# EAGLE board thermal-flashlight (EAGLE 6.5.0)
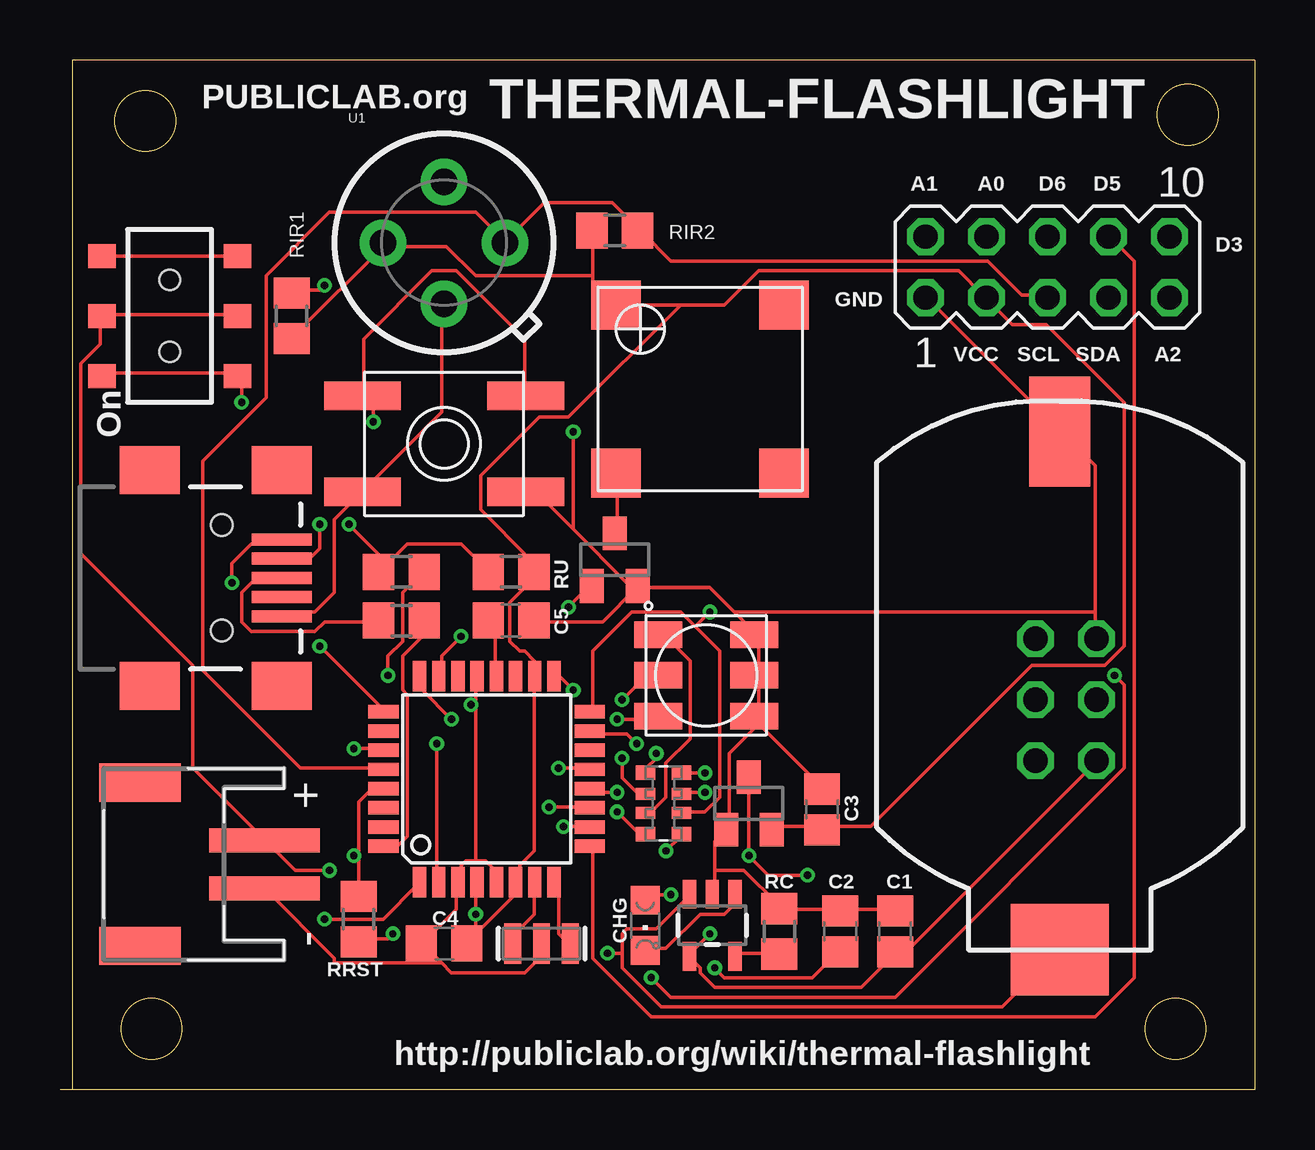
[diagram p0: board, top side]
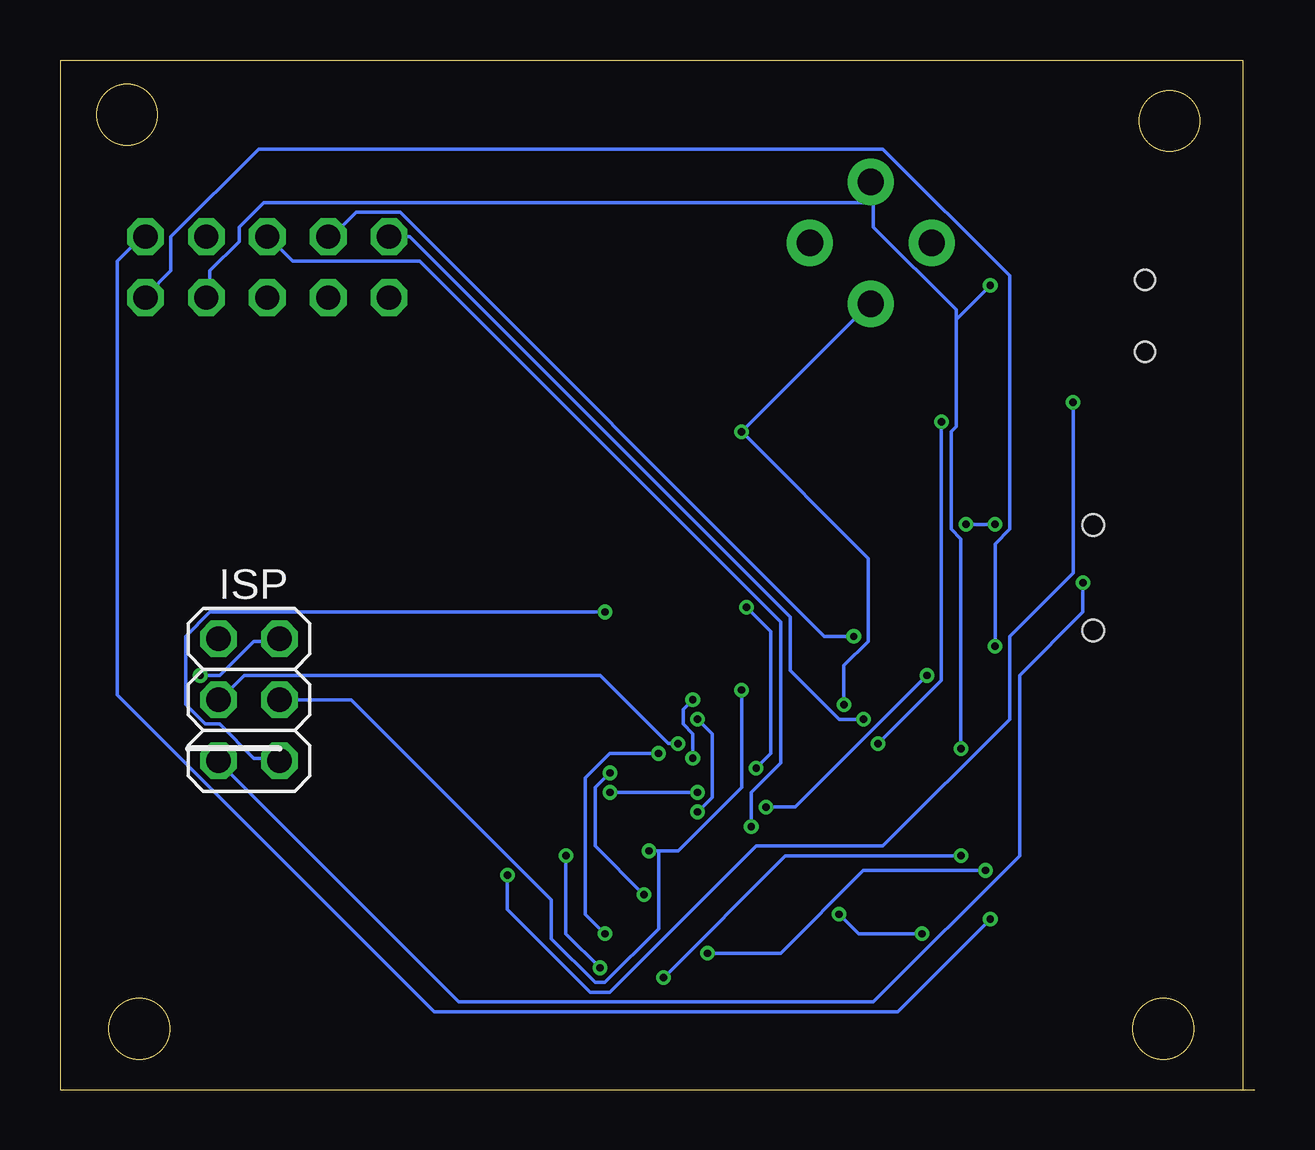
[diagram p1: board, bottom side, seen from below]

Size 49.78 x 42.93 mm. Coordinates in mm from the lower left corner, seen from the top.
Outline: 0.51,0 49.78,0 49.78,42.93 0.51,42.93 0.51,0
Outline: 0.51,0 0,0
Outline: circle at 3.81,2.54 radius 1.27
Outline: circle at 3.56,40.39 radius 1.27
Outline: circle at 46.99,40.64 radius 1.27
Outline: circle at 46.48,2.54 radius 1.27
Copper layers (1*16): Top 0.035mm / dielectric 1.5mm / Bottom 0.035mm
Design rules "Fusion_eagle_rule_v1.1 *": minimum track width 6mil, minimum drill 12mil, track to track 6mil, track to pad 6mil, pad to pad 6mil, via to via 6mil, smd to smd 0mil, copper to edge 10mil, drill to drill 10mil, minimum pad ring 10mil, minimum via ring 6mil, stop-mask expansion 2mil, vias tented up to drill 100mil, thermal gap 25mil
Net classes: 1 power: width 0.254 mm, clearance 0.203 mm
vRestrict: area 22.9,6.1 to 23.6,7.6; area 9.7,11.7 to 10.7,12.7

## Footprints (pad centres in the part's own frame; a part is rotated, then mirrored left to right if it is on the bottom)
BATTCOM_20MM_PTH_SMT = smd 4.572 x 2.54: P$1 0,0 | smd 3.81 x 4.064: P$2 21.59,0
EVQ-Q2 = smd 3.2 x 1.2: A -3.4,-2; A' 3.4,-2; B -3.4,2; B' 3.4,2
C0805 = smd 1.3 x 1.5: 1 -0.85,0; 2 0.85,0
C0805' = smd 1.3 x 1.5: 1 -0.95,0; 2 0.95,0
CHIPLED_0805 = smd 1.2 x 1.2: A 0,-1.05; C 0,1.05
JST-PH-2-SMT-RA = smd 1 x 4.6: 1 1,-3.7; 2 -1,-3.7 | smd 1.6 x 3.4: NC1 -3.4,1.5; NC2 3.4,1.5
TQFP32-08 = smd 1.27 x 0.559: 1 -4.293,2.8; 2 -4.293,2; 3 -4.293,1.2; 4 -4.293,0.4; 5 -4.293,-0.4; 6 -4.293,-1.2; 7 -4.293,-2; 8 -4.293,-2.8; 17 4.293,-2.8; 18 4.293,-2; 19 4.293,-1.2; 20 4.293,-0.4; 21 4.293,0.4; 22 4.293,1.2; 23 4.293,2; 24 4.293,2.8 | smd 0.559 x 1.27: 9 -2.8,-4.293; 10 -2,-4.293; 11 -1.2,-4.293; 12 -0.4,-4.293; 13 0.4,-4.293; 14 1.2,-4.293; 15 2,-4.293; 16 2.8,-4.293; 25 2.8,4.293; 26 2,4.293; 27 1.2,4.293; 28 0.4,4.293; 29 -0.4,4.293; 30 -1.2,4.293; 31 -2,4.293; 32 -2.8,4.293
SOT23-5 = smd 0.55 x 1.2: 1 -0.95,-1.3; 2 0,-1.3; 3 0.95,-1.3; 4 0.95,1.3; 5 -0.95,1.3
SOT23 = smd 1 x 1.4: 1 -0.95,-1.1; 2 0.95,-1.1; 3 0,1.1
2X03 = drill 1.016 octagon: 1 -2.54,-1.27; 2 -2.54,1.27; 3 0,-1.27; 4 0,1.27; 5 2.54,-1.27; 6 2.54,1.27
AYZ0202 = smd 1 x 1.15: 1 -2.5,2.825; 2 0,2.825; 3 2.5,2.825; 4 -2.5,-2.825; 5 0,-2.825; 6 2.5,-2.825 | hole 0.85: 1.5,0; -1.5,0
RGBLED5050 = smd 2 x 1.1: 1 -2,1.7; 2 -2,0; 3 -2,-1.7; 4 2,-1.7; 5 2,0; 6 2,1.7
R0805 = smd 1.3 x 1.5: 1 -0.95,0; 2 0.95,0
EXB38V = smd 0.6 x 0.8: 1 -1.275,-0.75; 4 1.275,-0.75; 5 1.275,0.75; 8 -1.275,0.75 | smd 0.5 x 0.8: 2 -0.4,-0.75; 3 0.4,-0.75; 6 0.4,0.75; 7 -0.4,0.75
R0805@1 = smd 1.3 x 1.5: 1 -0.95,0; 2 0.95,0
MA05-2 = drill 1.016 octagon: 1 -5.08,-1.27; 2 -5.08,1.27; 3 -2.54,-1.27; 4 -2.54,1.27; 5 0,-1.27; 6 0,1.27; 7 2.54,-1.27; 8 2.54,1.27; 9 5.08,-1.27; 10 5.08,1.27
TO-39 = drill 1.1 pad 1.93: 1 2.54,0; 2 0,2.54; 3 -2.54,0; 4 0,-2.54
SMT-8585-BUZZER = smd 2.05 x 2.05: + -3.5,-3.5; - 3.5,-3.5; NC1 -3.5,3.5; NC2 3.5,3.5
RESONATOR-SMD = smd 0.7 x 1.7: 1 -1.2,0; 2 0,0; 3 1.2,0
USB-MINIB = smd 2.5 x 0.5: D+ 2.5,0; D- 2.5,0.8; GND 2.5,-1.6; ID 2.5,-0.8; VBUS 2.5,1.6 | smd 2.5 x 2: GND@1 -3,-4.5; GND@2 -3,4.5; GND@3 2.5,4.5; GND@4 2.5,-4.5 | hole 0.9: 0,2.2; 0,-2.2

## Placement (x,y rotation side)
BAT1  LIR2032  [BATTCOM_20MM_PTH_SMT]  41.66,27.43 270 top
BTN  [EVQ-Q2]  16,26.92 0 top
C1  10u  [C0805]  34.8,6.6 90 top
C2  10u  [C0805]  32.51,6.6 90 top
C3  10u  [C0805]  31.75,11.68 90 top
C4  0.1uF  [C0805']  16,6.1 0 top
C5  0.1uF  [C0805']  18.8,19.56 180 top
CHG  0805  [CHIPLED_0805]  24.38,6.86 180 top
CN1  [JST-PH-2-SMT-RA]  4.83,9.4 90 top
IC1  ATMEGA328P  [TQFP32-08]  17.78,12.95 90 top
IC2  MCP73831  [SOT23-5]  27.18,6.86 180 top
IC4  MCP1700-33  [SOT23]  28.7,11.94 0 top
ISP  [2X03]  41.91,16.26 90 bottom
J1  AYZ0202  [AYZ0202]  4.57,32.26 90 top
LED  RGBLED5050  [RGBLED5050]  26.92,17.27 0 top
Q4  BSS123  [SOT23]  23.11,22.1 0 top
RC  22K  [R0805]  29.97,6.6 270 top
RD+  47  [R0805]  14.22,19.56 0 top
RD-  47  [R0805]  14.22,21.59 0 top
RIR1  10K  [R0805]  9.65,32.26 270 top
RIR2  10K  [R0805]  23.11,35.81 180 top
RN1  [EXB38V]  25.15,11.94 90 top
RRST  10k  [R0805@1]  12.45,7.11 270 top
RU  1.5K  [R0805]  18.8,21.59 0 top
SV1  [MA05-2]  41.15,34.29 0 top
U1  MLX90614_  [TO-39]  16,35.31 0 top
U$1  BUZZER  [SMT-8585-BUZZER]  26.67,29.21 270 top
X  12MHz  [RESONATOR-SMD]  20.07,6.1 0 top
X1  USBSMD  [USB-MINIB]  6.73,21.34 0 top

## Library data of the parts
BAT1 IC2 J1 X = SparkFunNew
BTN CN1 IC4 LED U$1 = adafruit
C1-C3 = resistor
C4 C5 RC RD+ RD- RIR1 RIR2 RRST RU = rcl
CHG = led
IC1 = atmel; MPN: ATMEGA8-16AU; OC_FARNELL: 9171371; OC_NEWARK: 73M8863
ISP = pinhead
Q4 = transistor-small-signal
RN1 = resistor-dil; OC_FARNELL: unknown; OC_NEWARK: unknown
SV1 = con-lstb; OC_FARNELL: unknown; OC_NEWARK: unknown
U1 X1 = SparkFun

## Nets
A0: IC1.23 SV1.4
A1: IC1.24 SV1.2
A2: IC1.25 SV1.9
A3: IC1.26
AREF: C5.2 IC1.20
D2: IC1.32 RD+.2
D3: IC1.1 SV1.10
D4: BTN.B BTN.B' IC1.2
D5: IC1.9 SV1.8
D6: IC1.10 SV1.6
D7: IC1.11 RD-.2
D8: IC1.12 RN1.3
D9: IC1.13 Q4.1
D10: IC1.14
D+: RD+.1 X1.D+
D-: RD-.1 RU.1 X1.D-
GND: BAT1.P$1 BTN.A BTN.A' C1.2 C2.2 C3.2 C4.1 C5.1 CN1.2 IC1.3 IC1.5 IC1.21 IC2.2 IC4.1 ISP.6 LED.4 LED.5 LED.6 Q4.2 RC.1 SV1.1 U1.4 X1.GND X.2
MISO: IC1.16 ISP.1 RN1.2
MOSI: IC1.15 ISP.4
N$1: J1.3 J1.6
N$2: IC1.7 X.1
N$3: IC1.8 X.3
N$4: LED.3 RN1.8
N$5: CHG.C IC2.1
N$6: IC2.5 RC.2
N$7: Q4.3 U$1.-
N$8: LED.1 RN1.7
N$9: LED.2 RN1.6
N$10: CHG.A RN1.4
N$12: IC1.19
N$13: IC1.22
RESET: IC1.29 ISP.5 RRST.1
RXD: IC1.30
SCK: IC1.17 ISP.3 RN1.1
SCL: IC1.28 RIR2.1 SV1.5 U1.1
SDA: IC1.27 RIR1.1 SV1.7 U1.2
TXD: IC1.31
VBAT: BAT1.P$2 CN1.1 IC2.3 J1.2 J1.5
VBUS: C1.1 IC2.4 ISP.2 RN1.5 X1.VBUS
VCC: C3.1 C4.2 IC1.4 IC1.6 IC1.18 IC4.2 RIR1.2 RIR2.2 RRST.2 RU.2 SV1.3 U1.3 U$1.+
VDD: C2.1 IC4.3 J1.1 J1.4

## Tracks (layer width: path | path; a pad name or v marks a point on that pad's centre or on a via)
A0  (via drill 0.3)
  Top 0.152: v16.71,18.9 15.9,18.09 15.9,17.27 IC1.23
  Bottom 0.152: v16.71,18.9 17.93,18.9 35.61,36.58 37.44,36.58 38.46,35.56 SV1.4
A1  (via drill 0.3)
  Top 0.152: v16.31,15.44 15.09,16.66 15.09,17.07 IC1.24
  Bottom 0.152: v16.31,15.44 17.32,15.44 19.36,17.48 19.36,19.71 35.2,35.56 SV1.2
A2  (via drill 0.3)
  Top 0.152: v10.82,18.49 13.46,15.85 IC1.25
  Bottom 0.152: v10.82,18.49 10.82,22.76 10.21,23.37 10.21,33.93 15.49,39.22 41.5,39.22 45.16,35.56 45.16,34.14 46.18,33.12 SV1.9
AREF
  Top 0.152: IC1.20 18.14,17.27 18.14,19.3 17.93,19.51 C5.2
D2
  Top 0.152: IC1.32 13.66,10.16 14.07,10.16 14.48,10.57 14.48,16.46 14.28,16.66 14.28,18.09 15.09,18.9 15.09,19.51 RD+.2
D3  (via drill 0.3)
  Top 0.152: v11.02,7.11 13.46,7.11 14.88,8.53 IC1.1
  Bottom 0.152: v11.02,7.11 14.88,3.25 34.19,3.25 47.4,16.46 47.4,34.54 46.38,35.56 SV1.10
D4  (via drill 0.3)
  Top 0.152: v15.7,14.43 15.7,8.74 IC1.2 | v13.06,27.84 13.06,28.45 12.65,28.85 BTN.B 12.65,29.06 12.65,31.29 15.49,34.14 16.51,34.14 19.36,31.29 19.36,29.06 BTN.B'
  Bottom 0.152: v15.7,14.43 13.06,17.07 v13.06,27.84
D5
  Top 0.152: IC1.9 22.2,9.96 22.2,5.49 24.64,3.05 43.13,3.05 44.75,4.67 44.75,34.54 43.74,35.56 SV1.8
D6  (via drill 0.3)
  Top 0.152: v20.98,10.97 22,10.97 IC1.10
  Bottom 0.152: v20.98,10.97 20.98,12.39 19.76,13.61 19.76,19.51 34.8,34.54 40.08,34.54 41.1,35.56 SV1.6
D7  (via drill 0.3)
  Top 0.152: v20.37,11.79 22,11.79 IC1.11 | v13.66,17.27 13.66,18.09 14.28,18.69 14.28,20.73 15.09,21.54 RD-.2
  Bottom 0.152: v20.37,11.79 19.15,11.79 v13.66,17.27
D8  (via drill 0.3)
  Top 0.152: v26.87,12.39 26.06,12.39 RN1.3 | v23.22,12.39 22.2,12.39 IC1.12
  Bottom 0.152: v23.22,12.39 v26.87,12.39
D9  (via drill 0.3)
  Top 0.152: v20.78,13.41 22,13.41 IC1.13 | v21.18,20.12 22,20.93 Q4.1
  Bottom 0.152: v20.78,13.41 20.17,14.02 20.17,19.1 v21.18,20.12
D+
  Top 0.152: X1.D+ 8.18,21.34 7.57,20.73 7.57,19.51 7.98,19.1 10.62,19.1 11.02,19.51 13.26,19.51 RD+.1
D-  (via drill 0.3)
  Top 0.152: 13.66,21.95 14.48,22.76 16.71,22.76 17.73,21.74 RU.1 | 13.66,21.95 13.46,21.74 RD-.1 13.66,21.95 | v10.82,23.57 10.82,22.55 10.41,22.15 9.4,22.15 X1.D- | 13.66,21.95 v12.04,23.57
  Bottom 0.152: v12.04,23.57 v10.82,23.57
GND  (via drill 0.3)
  Top 0.152: 41.71,27.43 36.22,32.92 SV1.1 | 43.13,19.91 43.13,26.01 41.71,27.43 | 43.13,19.91 43.13,18.9 ISP.6 | 41.71,27.43 BAT1.P$1 | 17.32,17.27 IC1.21 17.32,17.07 17.32,16.05 | 15.09,6.1 16.51,7.52 16.51,8.53 IC1.3 16.71,8.74 16.71,9.35 16.92,9.55 17.32,9.55 | 17.32,9.55 17.73,9.55 18.14,9.14 18.14,8.74 IC1.5 | 17.32,9.55 17.32,16.05 | 15.09,6.1 15.9,5.28 | 15.9,5.28 16.31,4.88 19.36,4.88 19.96,5.49 19.96,6.1 X.2 | 15.09,6.1 C4.1 | 15.9,5.28 11.43,5.28 11.43,5.49 8.58,8.33 CN1.2 | X1.GND 9.4,19.91 10.62,19.91 11.43,20.73 11.43,23.77 12.45,24.79 BTN.A 12.65,24.99 15.9,28.25 15.9,32.72 U1.4 | 27.28,9.14 27.28,10.36 27.69,10.77 IC4.1 27.89,10.97 27.89,14.02 29.11,15.24 | 27.28,9.14 27.28,8.33 IC2.2 | C1.2 34.8,7.52 32.56,7.52 C2.2 32.36,7.52 30.12,7.52 RC.1 29.92,7.72 28.5,9.14 27.28,9.14 | 29.11,15.24 28.91,15.44 LED.4 | 29.11,15.24 31.75,12.6 C3.2 | 28.09,19.91 28.91,19.1 LED.6 29.11,18.9 29.11,17.27 | 28.09,19.91 27.08,20.93 24.23,20.93 Q4.2 | C5.1 19.76,19.51 22.61,19.51 24.03,20.93 Q4.2 | 21.39,23.37 23.62,21.13 24.03,21.13 Q4.2 | 21.39,23.37 19.96,24.79 19.56,24.79 BTN.A' | 29.11,17.27 29.11,15.65 LED.4 | 29.11,17.27 LED.5 | 29.11,15.24 LED.4 | 21.39,23.37 v21.39,27.43 | v17.12,16.05 17.32,16.05 | 28.09,19.91 43.13,19.91
  Bottom 0.152: U1.4 16.1,32.72 v21.39,27.43 16.1,22.15 16.1,18.69 17.12,17.68 v17.12,16.05
MISO  (via drill 0.3)
  Top 0.152: 26.47,19.3 25.86,19.91 23.83,19.91 22.2,18.29 22.2,15.85 IC1.16 | 26.47,19.3 27.48,18.29 27.48,12.19 26.87,11.58 26.06,11.58 RN1.2 | 26.47,19.3 v27.08,19.91
  Bottom 0.152: v27.08,19.91 43.54,19.91 44.55,18.9 44.55,16.05 43.74,15.24 43.13,15.24 41.71,13.82 40.69,13.82 ISP.1
MOSI  (via drill 0.3)
  Top 0.152: v24.03,14.43 23.62,14.83 22.2,14.83 IC1.15
  Bottom 0.152: v24.03,14.43 24.44,14.43 27.28,17.27 42.11,17.27 43.13,16.26 ISP.4
N$1
  Top 0.152: J1.3 1.88,34.75 7.37,34.75 J1.6
N$2
  Top 0.152: IC1.7 19.76,8.53 19.76,7.32 18.95,6.5 18.95,6.1 X.1
N$3
  Top 0.152: IC1.8 20.78,8.53 20.78,6.5 21.18,6.1 X.3
N$4  (via drill 0.3)
  Top 0.152: v23.22,11.58 24.03,10.77 24.23,10.77 RN1.8 | v23.22,15.44 24.84,15.44 LED.3
  Bottom 0.152: v23.22,11.58 22.61,12.19 22.61,14.83 v23.22,15.44
N$5
  Top 0.152: CHG.C 24.44,5.89 25.25,5.89 26.67,7.32 27.69,7.32 28.09,7.72 28.09,8.13 IC2.1
N$6
  Top 0.152: IC2.5 28.3,5.69 29.92,5.69 RC.2
N$7
  Top 0.152: Q4.3 23.22,23.37 23.22,25.6 U$1.-
N$8
  Top 0.152: RN1.7 24.44,11.58 24.64,11.58 25.25,12.19 25.25,13.61 26.26,14.63 26.26,17.88 25.04,19.1 LED.1
N$9  (via drill 0.3)
  Top 0.152: v23.42,13.82 23.42,13.01 24.03,12.39 24.23,12.39 RN1.6 | v23.42,16.26 24.44,17.27 LED.2
  Bottom 0.152: v23.42,13.82 23.42,14.83 23.83,15.24 23.83,15.85 v23.42,16.26
N$10  (via drill 0.3)
  Top 0.152: v26.87,13.21 26.06,13.21 RN1.4 | v25.45,8.13 24.64,8.13 24.44,7.92 CHG.A
  Bottom 0.152: v26.87,13.21 27.48,12.6 27.48,10.16 v25.45,8.13
RESET  (via drill 0.3)
  Top 0.152: RRST.1 12.45,9.75 | 12.45,9.75 12.45,11.99 12.85,12.39 13.46,12.39 IC1.29 | v43.94,17.27 44.35,16.87 44.35,13.41 34.8,3.86 25.45,3.86 v24.64,4.67 | 12.45,9.75 v12.24,9.75
  Bottom 0.152: v43.94,17.27 43.13,17.27 41.71,18.69 40.69,18.69 ISP.5 | v24.64,4.67 19.56,9.75 v12.24,9.75
SCK  (via drill 0.3)
  Top 0.152: v25.25,9.96 25.86,10.57 RN1.1 | v21.39,16.66 20.78,17.27 IC1.17
  Bottom 0.152: 24.84,9.96 24.03,9.96 21.39,12.6 v21.39,16.66 | 24.84,9.96 v25.25,9.96 | ISP.3 37.64,16.26 29.31,7.92 29.31,6.3 27.48,4.47 27.08,4.47 24.84,6.71 24.84,9.96
SCL
  Top 0.152: 18.54,35.36 17.32,36.58 11.23,36.58 8.58,33.93 8.58,28.85 5.94,26.21 5.94,17.48 10.01,13.41 13.46,13.41 IC1.28 | 18.54,35.36 20.17,36.98 23.01,36.98 24.03,35.97 RIR2.1 24.23,35.76 25.45,34.54 38.66,34.54 40.08,33.12 41.1,33.12 SV1.5 | 18.54,35.36 U1.1
SDA  (via drill 0.3)
  Top 0.152: v12.24,14.22 13.46,14.22 IC1.27 | v11.02,33.53 10.82,33.33 9.8,33.33 RIR1.1
  Bottom 0.152: v12.24,14.22 12.24,22.96 12.65,23.37 12.65,27.43 12.45,27.64 12.45,32.11 | 12.45,32.11 12.45,32.51 15.9,35.97 15.9,36.98 | 15.9,36.98 15.9,37.8 U1.2 15.9,36.98 | 12.45,32.11 v11.02,33.53 | 15.9,36.98 41.3,36.98 42.32,35.97 42.32,35.36 43.54,34.14 43.54,33.12 SV1.7
VBAT  (via drill 0.3)
  Top 0.152: 23.42,5.69 23.42,5.08 25.04,3.45 39.27,3.45 BAT1.P$2 | 23.42,5.69 23.42,6.5 23.62,6.71 24.84,6.71 26.06,7.92 26.06,8.13 IC2.3 | J1.5 7.37,32.31 1.88,32.31 J1.2 1.68,32.11 1.68,31.09 0.86,30.28 0.86,22.35 5.54,17.68 5.54,13.41 8.38,10.57 CN1.1 8.58,10.36 9.8,9.14 v11.23,9.14 | v22.81,5.69 23.42,5.69
  Bottom 0.152: v22.81,5.69 19.76,5.69 16.31,9.14 v11.23,9.14
VBUS  (via drill 0.3)
  Top 0.152: v24.84,14.02 24.84,13.82 24.44,13.41 RN1.5 | v27.08,6.5 26.26,5.69 IC2.4 26.26,5.49 26.67,5.08 26.67,4.88 27.28,4.27 33.38,4.27 34.8,5.69 C1.1 34.8,5.89 35.41,5.89 43.13,13.61 ISP.2 | v7.16,21.13 7.16,21.95 7.98,22.76 9.2,22.76 X1.VBUS
  Bottom 0.152: v24.84,14.02 26.87,14.02 27.89,13.01 27.89,7.32 v27.08,6.5 | v7.16,21.13 7.16,19.91 9.8,17.27 9.8,9.75 15.9,3.66 33.17,3.66 43.13,13.61 ISP.2
VCC  (via drill 0.3)
  Top 0.152: 17.32,6.5 17.32,6.3 17.12,6.1 C4.2 17.32,6.5 | 17.32,6.5 v17.32,7.32 17.32,8.53 IC1.4 | 17.32,6.5 18.95,8.13 18.95,8.53 IC1.6 19.15,8.74 19.15,9.35 19.76,9.96 19.76,17.07 IC1.18 19.76,17.27 19.76,17.88 19.36,18.29 19.15,18.29 18.75,18.69 18.75,20.32 19.56,21.13 19.56,21.54 RU.2 19.56,21.74 19.56,22.15 17.53,24.18 17.53,25.6 19.96,28.04 21.18,28.04 25.86,32.72 | v13.87,6.5 13.66,6.3 12.45,6.3 RRST.2 | 22.2,33.93 22.2,33.53 23.01,32.72 U$1.+ 23.22,32.72 25.86,32.72 | 22.2,33.93 22.2,35.76 RIR2.2 | 13.46,35.15 9.8,31.5 RIR1.2 | 22.2,33.93 17.32,33.93 16.1,35.15 13.46,35.15 | 13.46,35.15 U1.3 | 31.75,10.97 29.72,10.97 IC4.2 | 31.75,10.97 33.78,10.97 40.49,17.68 43.54,17.68 44.35,18.49 44.35,28.65 41.1,31.9 39.67,31.9 38.66,32.92 SV1.3 38.46,33.12 37.44,34.14 29.11,34.14 27.69,32.72 25.86,32.72 | 31.75,10.97 C3.1
  Bottom 0.152: v13.87,6.5 16.51,6.5 v17.32,7.32
VDD  (via drill 0.3)
  Top 0.152: J1.1 1.88,29.87 7.37,29.87 J1.4 7.57,29.67 v7.57,28.65 | IC4.3 v28.7,9.75 29.52,8.94 v31.14,8.94 | v27.28,5.08 27.69,4.67 31.34,4.67 32.36,5.69 C2.1
  Bottom 0.152: v28.7,9.75 28.7,6.5 v27.28,5.08 | v7.57,28.65 7.57,21.54 10.21,18.9 10.21,15.44 15.49,10.16 20.78,10.16 26.87,4.06 27.69,4.06 31.14,7.52 v31.14,8.94

## Text on the board
tNames: PUBLICLAB.org | THERMAL-FLASHLIGHT | A1 | A0 | D6 | D5 | D3 | GND | VCC | SCL | SDA | A2 | On | http://publiclab.org/wiki/thermal-flashlight